# EAGLE board PCB_v8 (EAGLE 9.7.0)
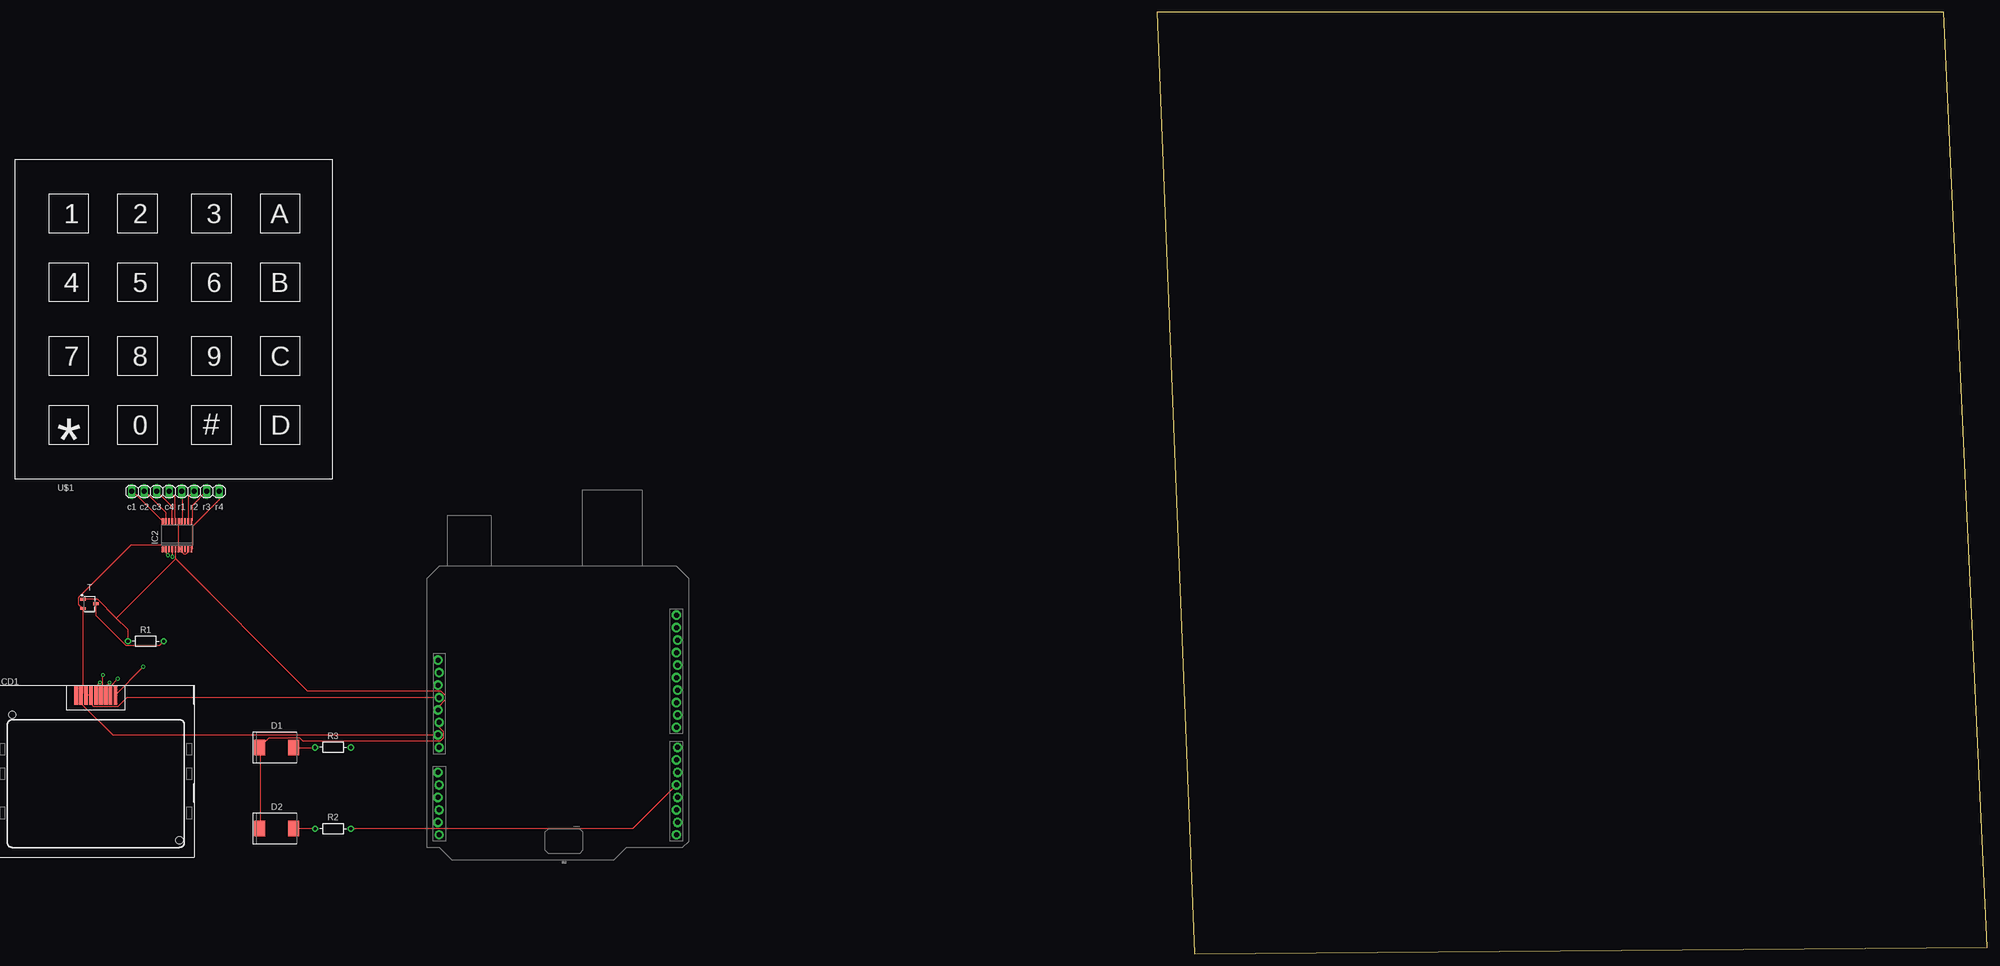
[diagram p0: board, top side]
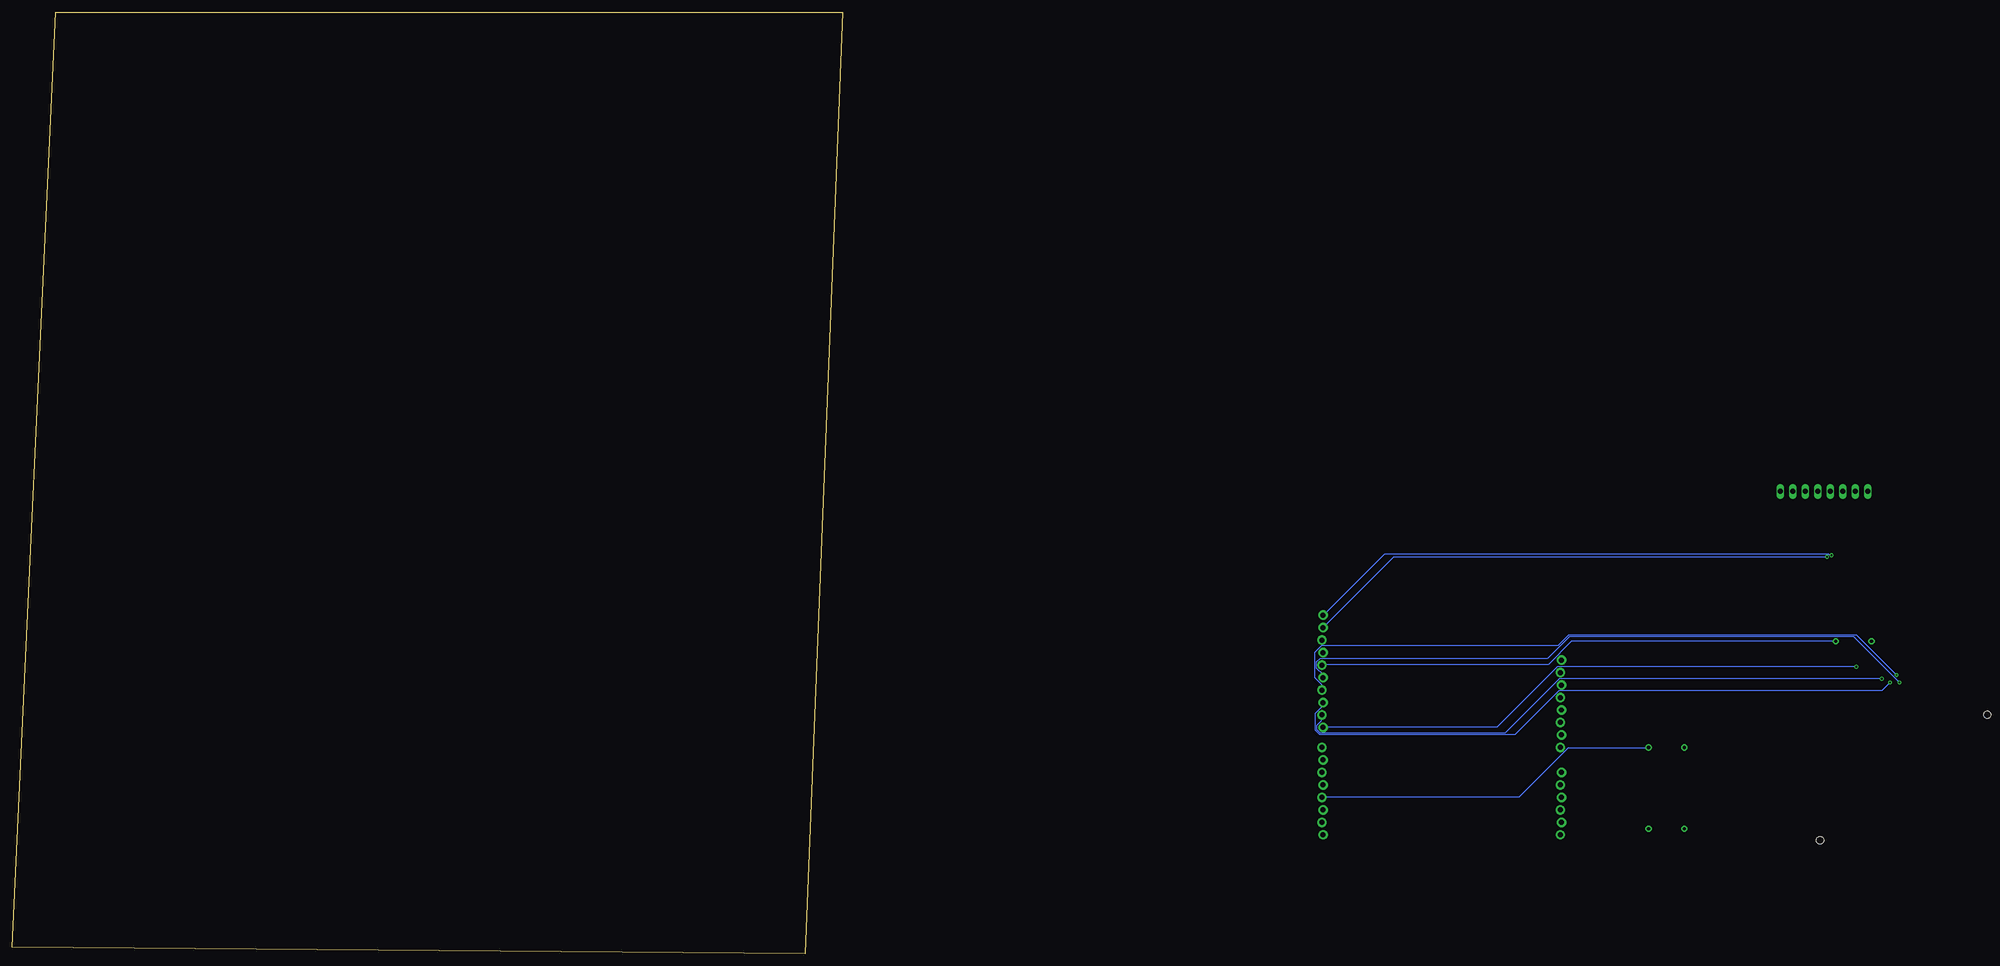
[diagram p1: board, bottom side, seen from below]

Size 168.89 x 191.44 mm. Coordinates in mm from the lower left corner, seen from the top.
Outline: 7.62,0 168.89,1.27 160,191.44 0,191.44 7.62,0
Copper layers (1*16): Top 0.035mm / dielectric 1.5mm / Bottom 0.035mm
Design rules "default": minimum track width 6mil, minimum drill 0.35mm, track to track 6mil, track to pad 6mil, pad to pad 6mil, via to via 6mil, smd to smd 6mil, copper to edge 40mil, drill to drill 6mil, minimum pad ring 10mil, minimum via ring 8mil, stop-mask expansion 4mil, vias tented up to drill 0mil, thermal gap 10mil

## Footprints (pad centres in the part's own frame; a part is rotated, then mirrored left to right if it is on the bottom)
UNO_R3_SHIELD_NOLABELS_LOCK = drill 1.016 pad 1.88: 3.3V 24.13,-3.81; 5V 24.384,-1.27; A0 24.384,11.43; A1 24.13,13.97; A2 24.384,16.51; A3 24.13,19.05; A4 24.384,21.59; A5 24.13,24.13; AREF -24.384,-15.494; D2 -24.13,19.05; D3 -24.384,16.51; D4 -24.13,13.97; D5 -24.384,11.43; D6 -24.13,8.89; D7 -24.384,6.35; D8 -24.13,2.286; D9 -24.384,-0.254; D10 -24.13,-2.794; D11 -24.384,-5.334; D12 -24.13,-7.874; D13 -24.384,-10.414; GND@0 24.13,1.27; GND@1 24.384,3.81; GND@2 -24.13,-12.954; IOREF 24.13,-8.89; NC 24.384,-11.43; RES 24.384,-6.35; RX -24.13,24.13; SCL -24.13,-20.574; SDA -24.13,-18.034; TX -24.384,21.59; VIN 24.13,6.35
DIOM7959X625N = smd 2.252 x 3.12: 1 -3.457,0; 2 3.457,0
SSOP20 = smd 0.35 x 1.2: 1 -2.925,-2.85; 2 -2.275,-2.85; 3 -1.625,-2.85; 4 -0.975,-2.85; 5 -0.325,-2.85; 6 0.325,-2.85; 7 0.975,-2.85; 8 1.625,-2.85; 9 2.275,-2.85; 10 2.925,-2.85; 11 2.925,2.85; 12 2.275,2.85; 13 1.625,2.85; 14 0.975,2.85; 15 0.325,2.85; 16 -0.325,2.85; 17 -0.975,2.85; 18 -1.625,2.85; 19 -2.275,2.85; 20 -2.925,2.85
LPH-7366 = smd 0.75 x 4: 1 4,17; 2 3,17; 3 2,17; 4 1,17; 5 0,17; 6 -1,17; 7 -2,17; 8 -3,17; 9 -4,17 | hole 1.5: -17,13; 17,-12.5
RESAD724W46L381D178B = drill 0.66 pad 1.26: 1 -3.62,0; 2 3.62,0
SOT95P285X113-3N = smd 1.12 x 0.589: 1 -1.3,0.95; 2 -1.3,-0.95; 3 1.3,0
KEYPAD4X4 = drill 1.016 long: 1 23.81,-2.54; 2 26.35,-2.54; 3 28.89,-2.54; 4 31.43,-2.54; 5 33.97,-2.54; 6 36.51,-2.54; 7 39.05,-2.54; 8 41.59,-2.54

## Placement (x,y rotation side)
B2  ARDUINO_UNO_R3  [UNO_R3_SHIELD_NOLABELS_LOCK]  -121.92,48.26 180 top  (outside the outline)
D1  DIODE  [DIOM7959X625N]  -179.07,41.91 0 top  (outside the outline)
D2  DIODE  [DIOM7959X625N]  -179.07,25.4 0 top  (outside the outline)
IC2  PCF8574TS  [SSOP20]  -199.39,85.09 0 top  (outside the outline)
LCD1  LPH-7366  [LPH-7366]  -215.9,35.56 0 top  (outside the outline)
R1  [RESAD724W46L381D178B]  -205.74,63.5 0 top  (outside the outline)
R2  [RESAD724W46L381D178B]  -167.64,25.4 0 top  (outside the outline)
R3  [RESAD724W46L381D178B]  -167.64,41.91 0 top  (outside the outline)
T  DS18B20  [SOT95P285X113-3N]  -217.17,71.12 0 top  (outside the outline)
U$1  [KEYPAD4X4]  -232.41,96.52 0 top  (outside the outline)

## Library data of the parts
B2 = SparkFun-Boards
D1 D2 = Diode; CATEGORY: Diode; SUB-CATEGORY: Rectifier
IC2 = micro-philips (1)
LCD1 = lph-7366
R1-R3 = Resistor; CATEGORY: Resistor; SUB-CATEGORY: Fixed
T = Sensor; CATEGORY: Sensor; MANUFACTURER: Allegro microsystems; MPN: DS18B20; OPERATING_TEMP: -40 to 150 °C; PART_STATUS: Active; ROHS_COMPLIANT: RoHS3 Compliant; SUB-CATEGORY: Magnetic
U$1 = keypad_4x4_raw

## Nets
N$1: B2.5V IC2.5 R1.1 T.1
N$2: B2.D13 R1.2 T.3
N$3: D1.2 R3.1
N$4: B2.D3 R3.2
N$5: B2.D4 R2.2
N$6: D2.2 R2.1
N$7: B2.GND@0 D1.1 D2.1
N$8: IC2.10 U$1.8
N$9: B2.GND@1 IC2.6 IC2.7 IC2.9 IC2.15 LCD1.8 T.2
N$10: B2.SCL IC2.2
N$11: IC2.11 U$1.7
N$12: IC2.12 U$1.6
N$13: IC2.14 U$1.5
N$15: IC2.20 U$1.1
N$16: IC2.19 U$1.2
N$17: IC2.17 U$1.3
N$18: IC2.16 U$1.4
N$19: B2.SDA IC2.4
N$20: B2.D8 LCD1.1
N$21: B2.D9 LCD1.2
N$22: B2.D10 LCD1.3
N$23: B2.D11 LCD1.4
N$24: B2.D12 LCD1.5
N$25: B2.3.3V LCD1.6 LCD1.7

## Tracks (layer width: path | path; a pad name or v marks a point on that pad's centre or on a via)
N$1
  Top 0.152: -211.73,68.22 -209.45,65.94 -209.45,63.5 R1.1 | -211.73,68.22 -215.54,72.03 -218.44,72.03 T.1 | -199.7,80.26 -199.7,82.09 IC2.5 | -211.73,68.22 -199.7,80.26 | -199.7,80.26 -172.87,53.44 -145.75,53.44 -144.83,52.53 -144.83,51.61 -146.2,50.24 -146.2,49.63 B2.5V
N$2
  Top 0.152: T.3 -215.85,71.12 -215.85,68.68 -209.75,62.59 -203.05,62.59 -202.13,63.5 R1.2
  Bottom 0.152: R1.2 -148.34,63.5 -143.61,58.78 -97.59,58.78 B2.D13
N$3
  Top 0.152: R3.1 -171.35,41.86 -175.46,41.86 D1.2
N$4
  Bottom 0.152: R3.2 -163.88,41.86 -147.73,41.86 -137.67,31.8 -97.59,31.8 B2.D3
N$5
  Top 0.152: R2.2 -106.73,25.4 -97.89,34.24 B2.D4
N$6
  Top 0.152: R2.1 D2.2
N$7
  Top 0.152: D2.1 -182.47,25.4 -182.47,41.86 D1.1 -182.47,42.01 -180.65,43.84 -174.4,43.84 -173.79,43.23 -145.75,43.23 -145.14,43.84 -145.14,45.06 -146.05,45.97 B2.GND@0
N$8
  Top 0.152: IC2.10 -196.34,82.24 -196.34,86.82 -190.86,92.3 -190.86,93.98 U$1.8
N$9
  Top 0.152: IC2.9 -197.26,82.09 -197.26,81.64 -197.56,81.33 -198.02,81.33 -198.32,81.64 -198.32,82.09 IC2.7 -198.48,82.24 -198.93,82.24 IC2.6 -199.09,82.24 -199.09,83.16 | -199.09,83.16 -199.09,87.88 IC2.15 | B2.GND@1 -212.5,44.45 -218.9,50.85 -218.9,52.53 LCD1.8 -218.9,52.68 -218.59,52.98 -218.59,70.05 T.2 -218.59,70.21 -219.35,70.97 -219.35,72.49 -208.69,83.16 -199.09,83.16
N$10  (via drill 0.35)
  Top 0.152: v-201.22,81.03 -201.52,81.33 -201.52,82.09 IC2.2
  Bottom 0.152: v-201.22,81.03 -200.91,81.03 -200.61,81.33 -110.39,81.33 -97.89,68.83 B2.SCL
N$11
  Top 0.152: IC2.11 -196.34,88.04 -196.34,91.08 -193.45,93.98 U$1.7
N$12
  Top 0.152: IC2.12 -197.1,88.04 -197.1,92.91 -196.04,93.98 U$1.6
N$13
  Top 0.152: IC2.14 -198.32,88.04 -198.32,93.98 U$1.5
N$15
  Top 0.152: U$1.1 -208.38,93.98 -202.44,88.04 IC2.20
N$16
  Top 0.152: IC2.19 -201.68,88.04 -201.68,89.71 -205.94,93.98 U$1.2
N$17
  Top 0.152: IC2.17 -200.46,88.04 -200.46,90.93 -203.51,93.98 U$1.3
N$18
  Top 0.152: IC2.16 -199.85,88.04 -199.85,92.91 -200.91,93.98 U$1.4
N$19  (via drill 0.35)
  Top 0.152: v-200.3,80.72 -200.3,82.09 IC2.4
  Bottom 0.152: v-200.3,80.72 -112.22,80.72 B2.SDA
N$20  (via drill 0.35)
  Top 0.152: v-206.25,58.32 -211.89,52.68 LCD1.1
  Bottom 0.152: B2.D8 -133.1,45.97 -145.44,58.32 v-206.25,58.32
N$21  (via drill 0.35)
  Top 0.152: v-211.43,55.88 -212.8,54.51 -212.8,52.68 LCD1.2
  Bottom 0.152: v-211.43,55.88 -145.9,55.88 -134.77,44.76 -97.28,44.76 -96.52,45.52 -96.52,46.43 -97.43,47.35 -97.43,48.41 B2.D9
N$22  (via drill 0.35)
  Top 0.152: v-213.11,55.12 -213.87,54.36 -213.87,52.68 LCD1.3
  Bottom 0.152: v-213.11,55.12 -211.43,53.44 -145.75,53.44 -136.75,44.45 -97.13,44.45 -96.22,45.36 -96.22,48.87 -97.74,50.39 -97.74,51 B2.D10
N$23  (via drill 0.35)
  Top 0.152: v-214.48,56.64 -214.48,54.81 -214.78,54.51 -214.78,52.68 LCD1.4
  Bottom 0.152: v-214.48,56.64 -206.4,64.72 -147.73,64.72 -145.59,62.59 -97.43,62.59 -96.06,61.21 -96.06,56.19 -97.43,54.81 -97.43,53.59 B2.D11
N$24  (via drill 0.35)
  Top 0.152: v-215.09,55.12 -215.85,54.36 -215.85,52.68 LCD1.5
  Bottom 0.152: v-215.09,55.12 -205.79,64.41 -147.88,64.41 -143.46,59.99 -97.13,59.99 -96.37,59.23 -96.37,58.17 -97.74,56.79 -97.74,56.19 B2.D12
N$25
  Top 0.152: B2.3.3V -209.6,52.07 -211.43,50.24 -216.31,50.24 -216.76,50.7 -216.76,52.53 LCD1.6 -216.92,52.53 -217.83,52.53 LCD1.7